# EAGLE board Arturo_Verasv2 (EAGLE 9.0.1)

Size 116.51 x 105.4 mm. Coordinates in mm from the lower left corner, seen from the top.
Outline: 0,0 116.51,0 116.51,105.4 0,105.4 0,0
Copper layers (1*16): Top 0.035mm / dielectric 1.5mm / Bottom 0.035mm
Design rules "default *": minimum track width 20mil, minimum drill 0.35mm, track to track 10mil, track to pad 8mil, pad to pad 6mil, via to via 6mil, smd to smd 6mil, copper to edge 40mil, drill to drill 6mil, minimum pad ring 10mil, minimum via ring 8mil, stop-mask expansion 4mil, vias tented up to drill 0mil, thermal gap 10mil

## Footprints (pad centres in the part's own frame; a part is rotated, then mirrored left to right if it is on the bottom)
ARDUINO-PRO-MINI#SMP = drill 1: J6.1 -12.7,7.62; J6.2 -10.16,7.62; J6.3 -7.62,7.62; J6.4 -5.08,7.62; J6.5 -2.54,7.62; J6.6 0,7.62; J6.7 2.54,7.62; J6.8 5.08,7.62; J6.9 7.62,7.62; J6.10 10.16,7.62; J6.11 12.7,7.62; J6.12 15.24,7.62; J7.1 15.24,-7.62; J7.2 12.7,-7.62; J7.3 10.16,-7.62; J7.4 7.62,-7.62; J7.5 5.08,-7.62; J7.6 2.54,-7.62; J7.7 0,-7.62; J7.8 -2.54,-7.62; J7.9 -5.08,-7.62; J7.10 -7.62,-7.62; J7.11 -10.16,-7.62; J7.12 -12.7,-7.62
DO41-10 = drill 1.118: A 5.08,0; C -5.08,0
SCREWTERMINAL-5MM-2 = drill 1.3 pad 2.032 square: 1 0,0 | drill 1.3 pad 2.032: 2 5,0
SCREWTERMINAL-5MM-3 = drill 1.3 pad 2.413 square: 1 0,0 | drill 1.3 pad 2.413: 2 5,0; 3 10,0
0204/7 = drill 0.813 octagon: 1 -3.81,0; 2 3.81,0
DC-DC-STEP-DOWN-LM2596 = drill 1.5 pad 2.5 square: IN+ -19.812,8.636; IN- -19.812,-8.636; OUT+ 19.812,8.636; OUT- 19.812,-8.636 | hole 3: -14.478,7.62; 15.24,-7.62
TO-92_2 = drill 1.016 pad 1.524: 1 0,-2.54; 2 -1.27,0 | drill 1.016 pad 1.524 square: 3 -2.54,-2.54
22-23-2031 = drill 1 long: 1 -2.54,0; 2 0,0; 3 2.54,0

## Placement (x,y rotation side)
ARDUINO_PRO-MINI  ARDUINO-PRO-MINI-5.0V#SMP  [ARDUINO-PRO-MINI#SMP]  33.02,40.64 270 top
D7  1N4004  [DO41-10]  24.13,20.32 0 top
J1  [SCREWTERMINAL-5MM-2]  63.5,41.91 270 top
J2  [SCREWTERMINAL-5MM-3]  63.5,30.48 270 top
J3  [SCREWTERMINAL-5MM-3]  6.35,27.94 270 top
J4  [SCREWTERMINAL-5MM-3]  29.21,12.7 0 top
J5  [SCREWTERMINAL-5MM-2]  6.35,39.37 270 top
J6  [SCREWTERMINAL-5MM-2]  6.35,50.8 270 top
R1  330  [0204/7]  48.26,20.32 0 top
R2  330  [0204/7]  48.26,29.21 0 top
R4  330  [0204/7]  48.26,38.1 0 top
R5  330  [0204/7]  60.96,54.61 270 top
R8  3k3  [0204/7]  13.97,26.67 270 top
R11  47k  [0204/7]  45.72,55.88 270 top
R12  3k3  [0204/7]  13.97,38.1 270 top
R13  330  [0204/7]  48.26,46.99 0 top
R16  3k3  [0204/7]  60.96,48.26 180 top
STEP_DOWN  DC-DC-STEP-DOWN-LM2596  [DC-DC-STEP-DOWN-LM2596]  35.56,78.74 0 top
T1  MPSA06  [TO-92_2]  55.88,31.75 270 top
T3  MPSA06  [TO-92_2]  54.61,52.07 180 top
T4  MPSA06  [TO-92_2]  54.61,58.42 270 top
T5  MPSA06  [TO-92_2]  19.05,38.1 90 top
T6  MPSA06  [TO-92_2]  55.88,40.64 270 top
T7  MPSA06  [TO-92_2]  19.05,27.94 90 top
T8  MPSA06  [TO-92_2]  55.88,22.86 270 top
UART  22-23-2031  [22-23-2031]  17.78,62.23 90 top

## Library data of the parts
ARDUINO_PRO-MINI STEP_DOWN = diy-modules
D7 = diode
J1 J5 J6 = SparkFun-Connectors; SF_SKU: PRT-08432
J2-J4 = SparkFun-Connectors; PROD_ID: CONN-10134; SF_SKU: PRT-08433
R1 R2 R4 R5 R8 R11-R13 R16 = resistor
T1 T3-T8 = transistores; MANUFACTURER_PART_NUMBER: MPSA06; VENDOR: Fairchild Semiconductor
UART = con-molex; MF: MOLEX; MPN: 22-23-2031; OC_FARNELL: 1462950; OC_NEWARK: 30C0862

## Nets
BUZZER_OUTPUT-: J1.2 T6.3
CC_OUTPUT-: J2.2 T8.3
DBUZZER_OUT: ARDUINO_PRO-MINI.J6.10 R4.1
DCC_OUT: ARDUINO_PRO-MINI.J6.12 R1.1
DDOOR_INPUT-: ARDUINO_PRO-MINI.J7.1 J3.3
DENABLEDOOR_INPUT-: ARDUINO_PRO-MINI.J7.4 J3.1
DGENERAL_INPUT: ARDUINO_PRO-MINI.J7.5 T5.3
DIGNITION_INPUT: ARDUINO_PRO-MINI.J7.2 T7.3
DJAMMINGAUX_INPUT-: ARDUINO_PRO-MINI.J7.7 J6.2
DLED_OUTPUT: ARDUINO_PRO-MINI.J7.3 R11.2
DSPEAKER_OUT: ARDUINO_PRO-MINI.J6.11 R2.1
DTDIN2_OUT-: ARDUINO_PRO-MINI.J6.9 R13.1
DTDOUT1_INPUT-: ARDUINO_PRO-MINI.J7.6 J5.1
DTDOUT2_INPUT-: ARDUINO_PRO-MINI.J7.8 J6.1
GENERAL_INPUT+: J5.2 R12.2
GND: ARDUINO_PRO-MINI.J6.2 J4.2 R16.1 STEP_DOWN.IN- STEP_DOWN.OUT- T1.1 T4.1 T5.1 T6.1 T7.1 T8.1
IGNITION_INPUT+: J3.2 R8.2
LED_OUTPUT-: J2.3 R5.2
N$1: R12.1 T5.2
N$2: R13.2 T3.2
N$3: R1.2 T8.2
N$4: R2.2 T1.2
N$5: R4.2 T6.2
N$6: R5.1 T4.3
N$7: ARDUINO_PRO-MINI.J7.12 UART.3
N$8: ARDUINO_PRO-MINI.J7.11 UART.2
N$9: ARDUINO_PRO-MINI.J7.9 UART.1
N$20: R11.1 T4.2
N$22: R8.1 T7.2
N$23: D7.C STEP_DOWN.IN+
SPEAKER_OUTPUT-: J2.1 T1.3
TDIN2_OUTPUT+: J1.1 R16.2 T3.1
VCC: ARDUINO_PRO-MINI.J6.4
VIN: D7.A J4.1 T3.3
VOUT: ARDUINO_PRO-MINI.J6.1 J4.3 STEP_DOWN.OUT+

## Tracks (layer width: path | path; a pad name or v marks a point on that pad's centre or on a via)
BUZZER_OUTPUT-  (1 unrouted)
CC_OUTPUT-  (1 unrouted)
DBUZZER_OUT  (1 unrouted)
DCC_OUT  (1 unrouted)
DDOOR_INPUT-  (1 unrouted)
DENABLEDOOR_INPUT-  (1 unrouted)
DGENERAL_INPUT  (1 unrouted)
DIGNITION_INPUT  (1 unrouted)
DJAMMINGAUX_INPUT-  (1 unrouted)
DLED_OUTPUT  (1 unrouted)
DSPEAKER_OUT  (1 unrouted)
DTDIN2_OUT-  (1 unrouted)
DTDOUT1_INPUT-  (1 unrouted)
DTDOUT2_INPUT-  (1 unrouted)
GENERAL_INPUT+  (1 unrouted)
GND  (10 unrouted)
IGNITION_INPUT+  (1 unrouted)
LED_OUTPUT-  (1 unrouted)
N$1  (1 unrouted)
N$2  (1 unrouted)
N$3  (1 unrouted)
N$4  (1 unrouted)
N$5  (1 unrouted)
N$6  (1 unrouted)
N$7  (1 unrouted)
N$8  (1 unrouted)
N$9  (1 unrouted)
N$20  (1 unrouted)
N$22  (1 unrouted)
N$23  (1 unrouted)
SPEAKER_OUTPUT-  (1 unrouted)
TDIN2_OUTPUT+  (2 unrouted)
VIN  (2 unrouted)
VOUT  (2 unrouted)
(copper drawn outside any net)
  shapes: Top area x2